# Altium PCB Serve.my-pi.PcbDoc
Units mm, origin at the board's own origin, x right, y up, seen from the top; angles counter-clockwise.
Board outline 50 x 50 mm, 2 copper layers (Top Layer, Bottom Layer), stack 1.671 mm thick; 89 components, 67 nets, 323 pads, 160 vias.
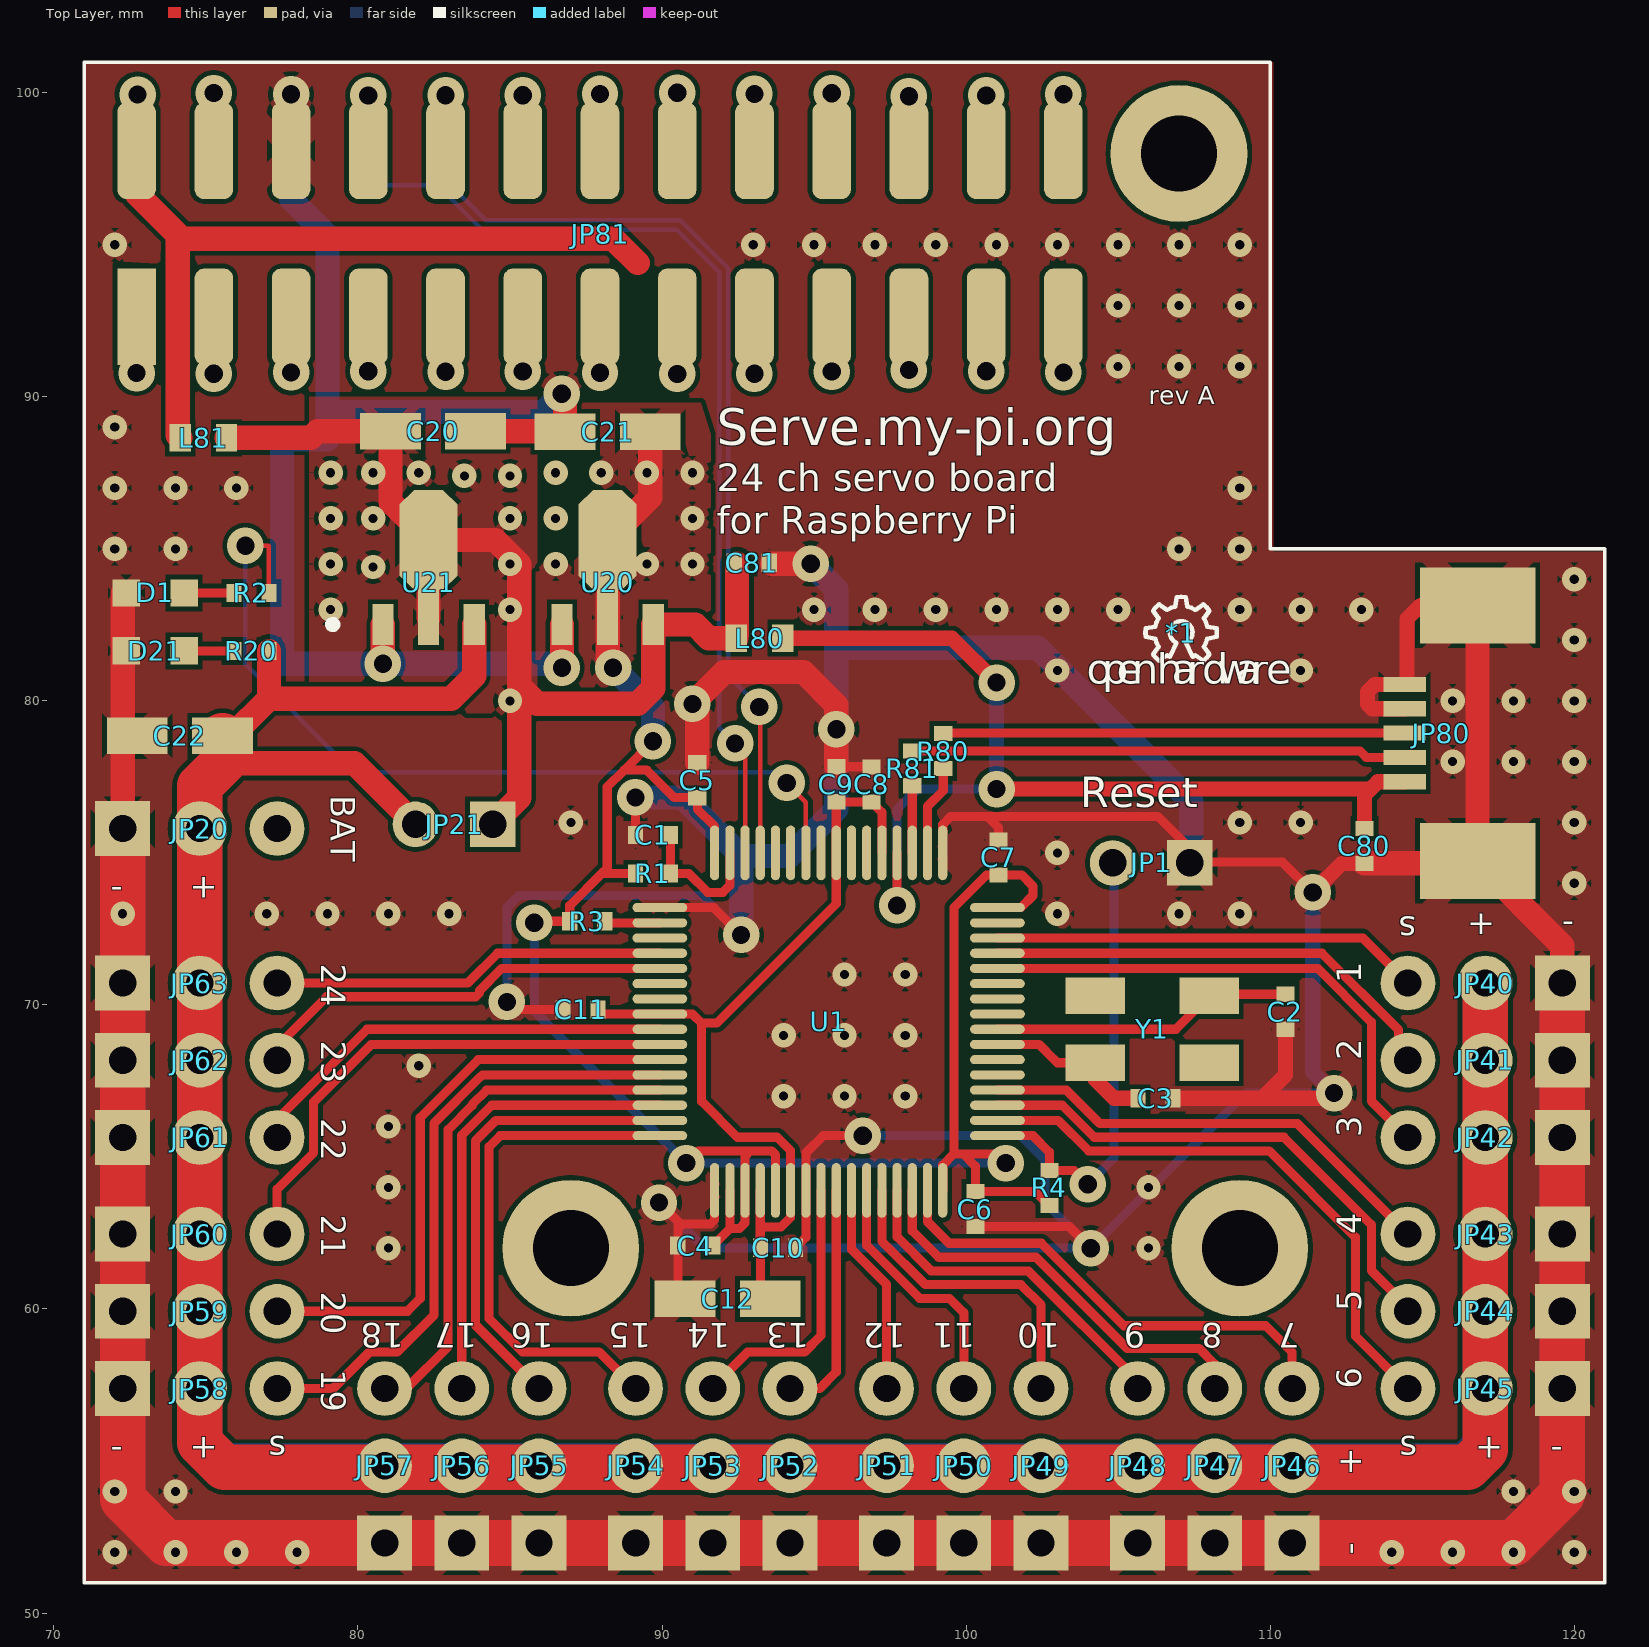
[diagram p0: Top Layer view]
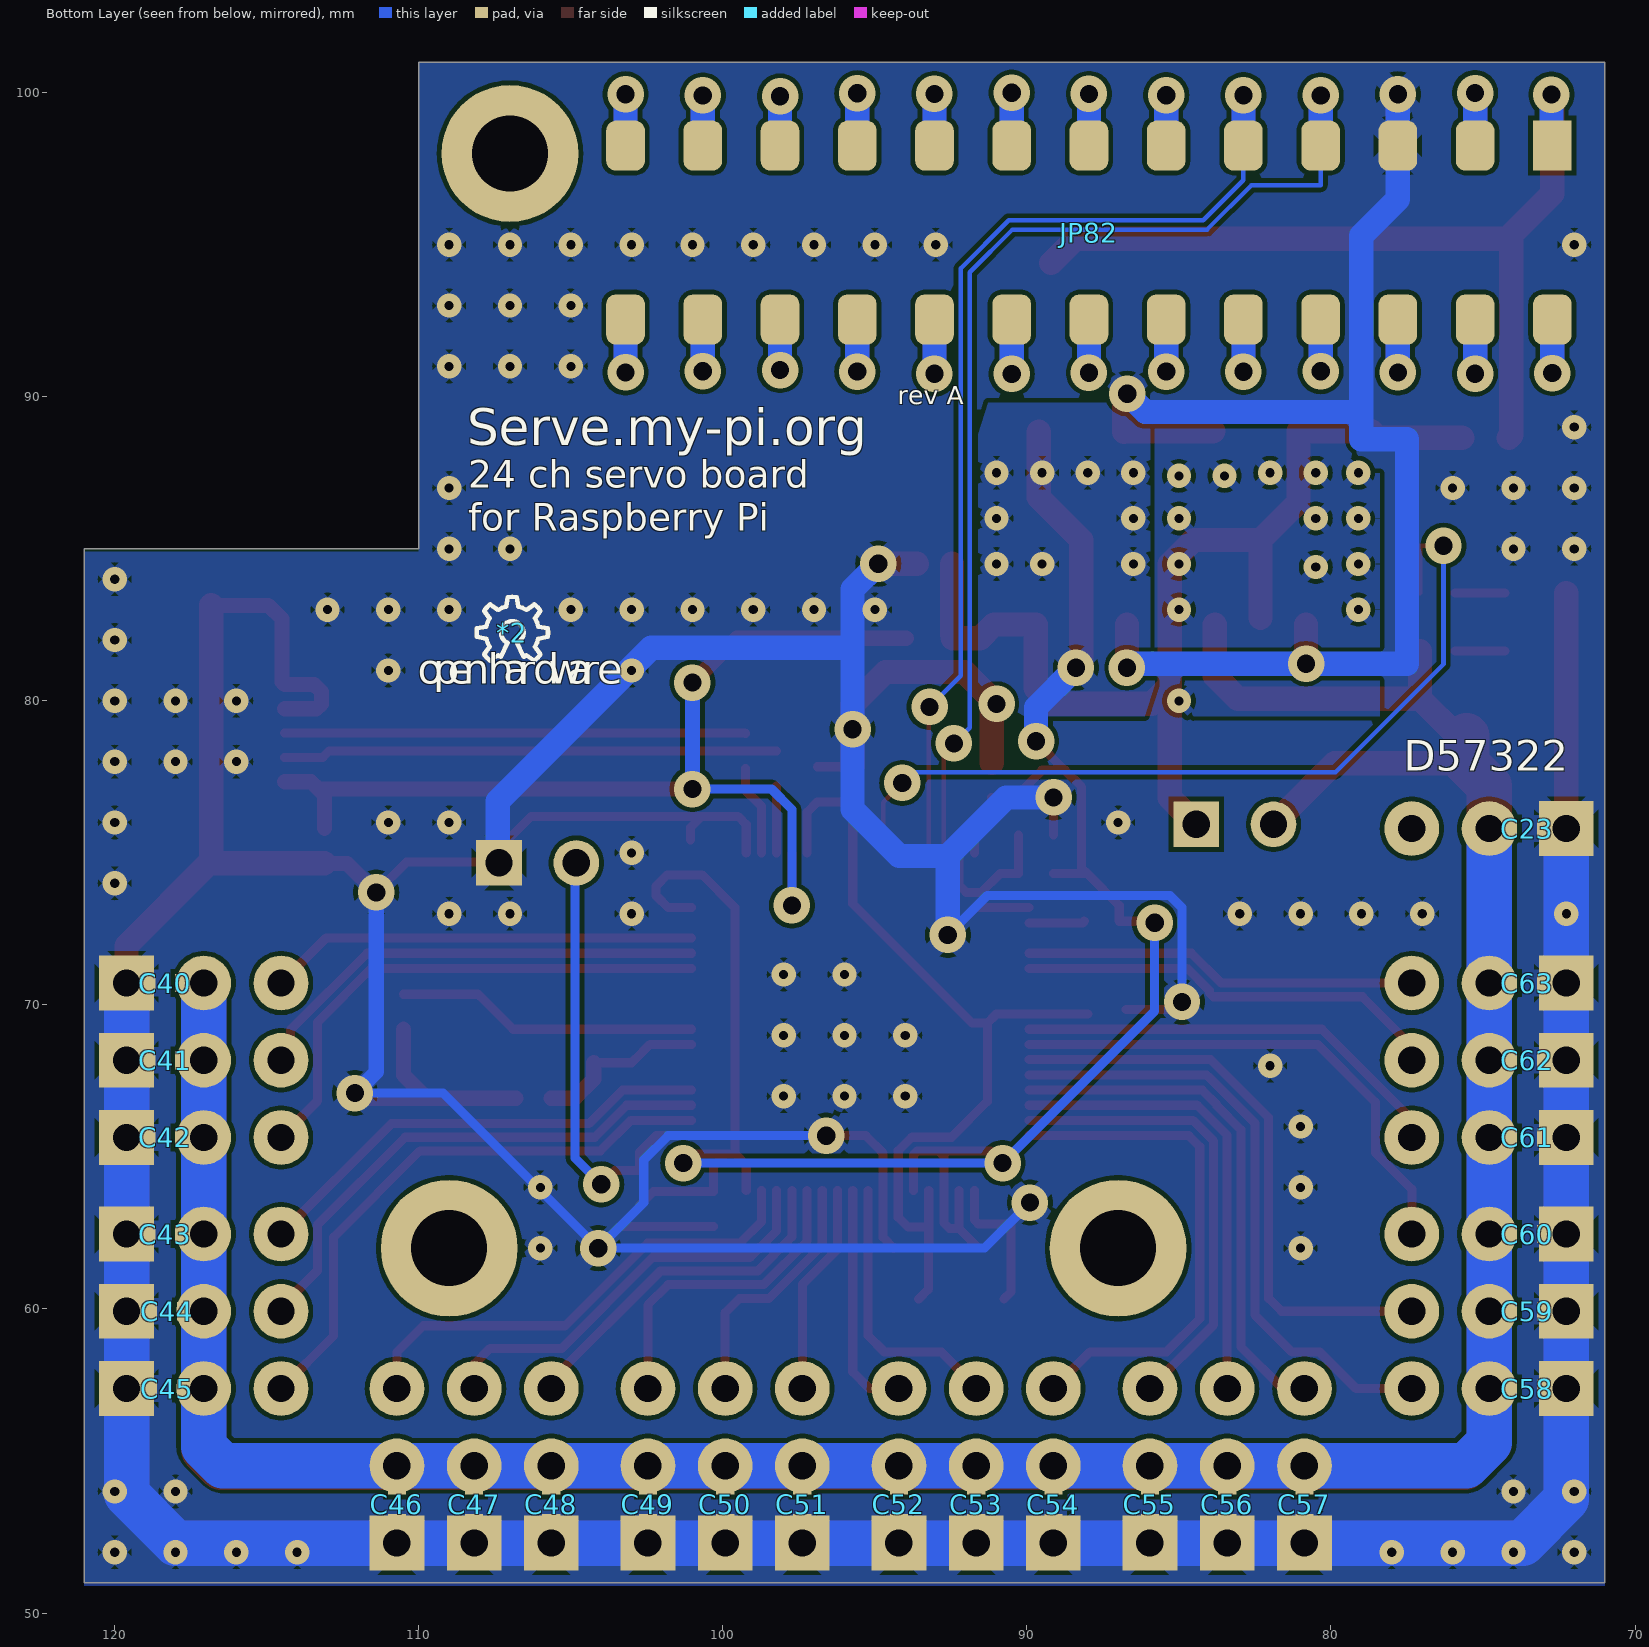
[diagram p1: Bottom Layer view, seen from below]

## Layer stack, top to bottom
Top Layer: signal copper 0.0356
Dielectric: core 1.6, FR-4, Dk 4.8
Bottom Layer: signal copper 0.0356

## Board outline
71,101 71,51 121,51 121,85 110,85 110,101

## Design rules (kind name [scope] priority, off if disabled: settings)
Clearance [All] p1: gap=0.15
ComponentClearance [All] p1: gap=0 collisioncheckmode=3 verticalgap=0 showdistances=FALSE
PolygonConnect PolygonConnect_1 [InNet('3V3') or InNet('GND') or InNet('NetC55_1') or InNet('SERVO-VDD')] p1: connectstyle=Relief reliefconductorwidth=0.6 reliefentries=4 polygonreliefangle="45 Angle"
PolygonConnect [All] p2: connectstyle=Relief reliefconductorwidth=0.3 reliefentries=4 polygonreliefangle="45 Angle"
RoutingVias RoutingVias_GND [InNet('GND')] p1: holewidth=0.9 width=1.5 viastyle="Through Hole" minholewidth=0.3 minwidth=0.7 maxholewidth=1.3 maxwidth=2
RoutingVias [All] p2: holewidth=0.4 width=0.7 viastyle="Through Hole" minholewidth=0.3 minwidth=0.7 maxholewidth=1.3 maxwidth=2
SilkToSilkClearance [All] p1: silktosilkclearance=0.05
SilkscreenOverComponentPads [All] p1: minsilkscreentomaskgap=0
SolderMaskExpansion [All] p1: expansion=0.102
Width Width_LOW_POWER [InNet('1V8')] p1: maxlimit=1 minlimit=0.3 preferedwidth=0.3
Width Width_GND [InNet('GND')] p2: maxlimit=2 minlimit=0.3 preferedwidth=0.3
Width [All] p3: maxlimit=2 minlimit=0.15 preferedwidth=0.15
25 further rules are at their usual default settings.

## Classes and differential pairs
component class Power: C16 C20 C21 C22 C23 D21 JP20 JP21 R20 U20 U21
component class Main: *1 C1 C2 C3 C4 C5 C6 C7 C8 C9 C10 C11 C12 C? D1 JP1 R1 R2 R3 R4 R? U1 U? Y1
component class SERVO-Outputs: C25 C26 C29 C30 C33 C34 C37 C39 C40 C41 C42 C43 C44 C45 C46 C47 C48 C49 C50 C51 C52 C53 C54 C55 C56 C57 C58 C59 C60 C61 C62 C63 JP6 JP12 JP13 JP16 JP19 JP24 JP40 JP41 JP42 JP43 JP44 JP45 JP46 JP47 JP48 JP49 JP50 JP51 JP52 JP53 JP54 JP55 JP56 JP57 JP58 JP59 JP60 JP61 JP62 JP63
net class SERVO-OUT[1..24]: SERVO-OUT1 SERVO-OUT2 SERVO-OUT3 SERVO-OUT4 SERVO-OUT5 SERVO-OUT6 SERVO-OUT7 SERVO-OUT8 SERVO-OUT9 SERVO-OUT10 SERVO-OUT11 SERVO-OUT12 SERVO-OUT13 SERVO-OUT14 SERVO-OUT15 SERVO-OUT16 SERVO-OUT17 SERVO-OUT18 SERVO-OUT19 SERVO-OUT20 SERVO-OUT21 SERVO-OUT22 SERVO-OUT23 SERVO-OUT24
component class Com: C80 C81 JP80 JP81 JP82 L80 L81 R80 R81

## Components (designator, comment, footprint, x,y, rotation, side; value= is the part's Value field where it differs from the comment)
*1 "OSHW" OSHW 107.07,82.24 r0 top
*2 "OSHW" OSHW 106.93,82.24 r180 bottom (schematic designator *1)
C1 "Condensateur" CC1005-0402 89.699,75.592 r0 top
C2 "Condensateur" CC1005-0402 110.5,69.775 r90 top
C3 "Condensateur" CC1005-0402 106.23,66.93 r0 top
C4 "Condensateur" CC1005-0402 91.095,62.084 r0 top
C5 "Condensateur" CC1005-0402 91.162,77.391 r270 top
C6 "Condensateur" CC1005-0402 100.306,63.287 r90 top
C7 "Condensateur" CC1005-0402 101.068,74.851 r270 top
C8 "Condensateur" CC1005-0402 96.89,77.25 r270 top
C9 "Condensateur" CC1005-0402 95.734,77.257 r270 top
C10 "Condensateur" CC1005-0402 93.815,62.015 r180 top
C11 "Condensateur" CC1005-0402 87.32,69.85 r0 top
C12 "Condensateur Polarise" TC3216-1206 92.16,60.33 r180 top
C20 "Condensateur Polarise" TC3216-1206 82.47,88.87 r0 top
C21 "Condensateur Polarise" TC3216-1206 88.21,88.85 r180 top
C22 "Condensateur Polarise" TC3216-1206 74.144,78.848 r180 top
C23 "Condensateur" CC1005-0402 73.55,75.8 r0 bottom
C40 "Condensateur" CC1005-0402 118.34,70.72 r180 bottom
C41 "Condensateur" CC1005-0402 118.34,68.18 r180 bottom
C42 "Condensateur" CC1005-0402 118.34,65.64 r180 bottom
C43 "Condensateur" CC1005-0402 118.34,62.465 r180 bottom
C44 "Condensateur" CC1005-0402 118.28,59.925 r180 bottom
C45 "Condensateur" CC1005-0402 118.28,57.385 r180 bottom
C46 "Condensateur" CC1005-0402 110.72,53.575 r90 bottom
C47 "Condensateur" CC1005-0402 108.18,53.575 r90 bottom
C48 "Condensateur" CC1005-0402 105.64,53.575 r90 bottom
C49 "Condensateur" CC1005-0402 102.465,53.575 r90 bottom
C50 "Condensateur" CC1005-0402 99.925,53.575 r90 bottom
C51 "Condensateur" CC1005-0402 97.385,53.575 r90 bottom
C52 "Condensateur" CC1005-0402 94.21,53.575 r90 bottom
C53 "Condensateur" CC1005-0402 91.67,53.575 r90 bottom
C54 "Condensateur" CC1005-0402 89.13,53.575 r90 bottom
C55 "Condensateur" CC1005-0402 85.955,53.575 r90 bottom
C56 "Condensateur" CC1005-0402 83.415,53.575 r90 bottom
C57 "Condensateur" CC1005-0402 80.875,53.575 r90 bottom
C58 "Condensateur" CC1005-0402 73.55,57.385 r0 bottom
C59 "Condensateur" CC1005-0402 73.55,59.925 r0 bottom
C60 "Condensateur" CC1005-0402 73.55,62.465 r0 bottom
C61 "Condensateur" CC1005-0402 73.55,65.64 r0 bottom
C62 "Condensateur" CC1005-0402 73.55,68.18 r0 bottom
C63 "Condensateur" CC1005-0402 73.55,70.72 r0 bottom
C80 "Condensateur" CC1005-0402 113.1,75.23 r90 top
C81 "Condensateur" CC1005-0402 92.95,84.54 r180 top
D1 "Led" DIODE-0603 73.382,83.547 r180 top
D21 "Led" DIODE-0603 73.382,81.642 r180 top
JP1 "Jumper" HDR1X2 107.36,74.67 r180 top
JP20 "SERVO Connector" PinHead-3pts 74.8,75.8 r90 top
JP21 "Jumper" HDR1X2 84.43,75.94 r180 top
JP40 "SERVO Connector" PinHead-3pts 117.07,70.72 r270 top
JP41 "SERVO Connector" PinHead-3pts 117.07,68.18 r270 top
JP42 "SERVO Connector" PinHead-3pts 117.07,65.64 r270 top
JP43 "SERVO Connector" PinHead-3pts 117.07,62.465 r270 top
JP44 "SERVO Connector" PinHead-3pts 117.07,59.925 r270 top
JP45 "SERVO Connector" PinHead-3pts 117.07,57.385 r270 top
JP46 "SERVO Connector" PinHead-3pts 110.72,54.845 r180 top
JP47 "SERVO Connector" PinHead-3pts 108.18,54.845 r180 top
JP48 "SERVO Connector" PinHead-3pts 105.64,54.845 r180 top
JP49 "SERVO Connector" PinHead-3pts 102.465,54.845 r180 top
JP50 "SERVO Connector" PinHead-3pts 99.925,54.845 r180 top
JP51 "SERVO Connector" PinHead-3pts 97.385,54.845 r180 top
JP52 "SERVO Connector" PinHead-3pts 94.21,54.845 r180 top
JP53 "SERVO Connector" PinHead-3pts 91.67,54.845 r180 top
JP54 "SERVO Connector" PinHead-3pts 89.13,54.845 r180 top
JP55 "SERVO Connector" PinHead-3pts 85.955,54.845 r180 top
JP56 "SERVO Connector" PinHead-3pts 83.415,54.845 r180 top
JP57 "SERVO Connector" PinHead-3pts 80.875,54.845 r180 top
JP58 "SERVO Connector" PinHead-3pts 74.8,57.385 r90 top
JP59 "SERVO Connector" PinHead-3pts 74.8,59.925 r90 top
JP60 "SERVO Connector" PinHead-3pts 74.8,62.465 r90 top
JP61 "SERVO Connector" PinHead-3pts 74.8,65.64 r90 top
JP62 "SERVO Connector" PinHead-3pts 74.8,68.18 r90 top
JP63 "SERVO Connector" PinHead-3pts 74.8,70.72 r90 top
JP80 "USB Mini-B SMD" UX60SC-MB-5ST 120.57,78.94 r0 top
JP81 "Top male part of Raspberry Pi expand port" "2x13 pins SMT male header" 72.72,92.82 r0 top
JP82 "Bottom female part of Raspberry Pi expand port" "2x13 pins SMT female header" 72.72,97.94 r0 bottom
L80 "Ferrite" CR1608-0603 93.22,82.06 r0 top
L81 "Ferrite" CR1608-0603 74.93,88.65 r0 top
R1 "Resistance" CR1005-0402 89.699,74.322 r180 top
R2 "Resistance" CR1005-0402 76.497,83.547 r180 top
R3 "Resistance" CR1005-0402 87.539,72.752 r180 top
R4 "Resistance" CR1005-0402 102.74,63.98 r270 top
R20 "Resistance" CR1005-0402 76.497,81.642 r0 top
R80 "Resistance" CR1005-0402 99.25,78.35 r270 top
R81 "Resistance" CR1005-0402 98.23,77.78 r270 top
U1 "AT32UC3B0xxx" TSQFP50P1200X1200-64N 95.48,69.45 r0 top
U20 "AP1117" SOT-89 88.21,83.9 r0 top
U21 "AP1117" SOT-89 82.32,83.9 r0 top
Y1 "Quartz" 7B 104.248,68.1 r0 top

## Footprints (in the part's own frame and the unit in brackets; to place one, negate y for a bottom-side part, rotate by r counter-clockwise, add the part's x,y. Pads: shape width x height; smd on the part's side, far side on the other; paste and mask are expansions set on the pad)
"2x13 pins SMT female header" [mm] "Dual row, SMT, female header (2x13 pins)"
  rect 1.27x1.65 smd: 1(0,-0.32)
  rrect50% 1.27x1.65 smd: 2(0,5.4) 3(2.54,-0.32) 4(2.54,5.4) 5(5.08,-0.32) 6(5.08,5.4) 7(7.62,-0.32) 8(7.62,5.4) 9(10.16,-0.32) 10(10.16,5.4) 11(12.7,-0.32) 12(12.7,5.4) 13(15.24,-0.32) 14(15.24,5.4) 15(17.78,-0.32) 16(17.78,5.4) 17(20.32,-0.32) 18(20.32,5.4) 19(22.86,-0.32) 20(22.86,5.4) 21(25.4,-0.32) 22(25.4,5.4) 23(27.94,-0.32) 24(27.94,5.4) 25(30.48,-0.32) 26(30.48,5.4)
"2x13 pins SMT male header" [mm] "Dual row, SMT, male header (2x13 pins)"
  rect 1.27x3.18 smd: 1(0,-0.19)
  rrect50% 1.27x3.18 smd: 2(0,5.27) 3(2.54,-0.19) 4(2.54,5.27) 5(5.08,-0.19) 6(5.08,5.27) 7(7.62,-0.19) 8(7.62,5.27) 9(10.16,-0.19) 10(10.16,5.27) 11(12.7,-0.19) 12(12.7,5.27) 13(15.24,-0.19) 14(15.24,5.27) 15(17.78,-0.19) 16(17.78,5.27) 17(20.32,-0.19) 18(20.32,5.27) 19(22.86,-0.19) 20(22.86,5.27) 21(25.4,-0.19) 22(25.4,5.27) 23(27.94,-0.19) 24(27.94,5.27) 25(30.48,-0.19) 26(30.48,5.27)
7B [mm] "SMD Quartz, 5x3.2 mm"
  rect 1.95x1.2 smd: 0(0,2.2) 0(3.75,0) 1(0,0) 2(3.75,2.2)
CC1005-0402 [mm]
  rect 0.5x0.6 smd: 1(-0.575,0) 2(0.575,0)
CR1005-0402 [mm]
  rect 0.5x0.6 smd: 1(-0.575,0) 2(0.575,0)
CR1608-0603 [mm]
  rect 0.7x0.9 smd: 1(-0.775,0) 2(0.75,0)
DIODE-0603 [mm]
  rect 0.9x0.9 smd: 1(-0.9,0) 2(1,0)
HDR1X2 [mm] "Connector; Header; 2 Position"
  rect 1.5x1.5 hole 0.9: 1(0,0)
  round 1.5 hole 0.9: 2(2.54,0)
OSHW [mm] "Open Hardware logo"
  silkscreen extent -1.17,-0.92 1.18,1.18
PinHead-3pts [mm]
  rect 1.8x1.8 hole 0.9: 1(0,2.54)
  round 1.8 hole 0.9: 2(0,0) 3(0,-2.54)
SOT-89 [mm] "SOT-89; Body 4.6 x 4.25 mm, inc. leads (LxW max)"
  oct 1.9x3.3 smd: 0(0,1.388)
  rect 0.7x1.35 smd: 1(-1.5,-1.388) 3(1.5,-1.388)
  rect 0.7x1.8 smd: 2(0,-1.163)
TC3216-1206 [mm] "Capacitor, SM Tantalum; Body 3.2 x 1.6 mm (LxW typ)"
  rect 2x1.2 smd: 1(-1.4,0) 2(1.4,0)
TSQFP50P1200X1200-64N [mm] "Thin QFP, 64-Leads, Body 10x10mm, Pitch 0.5mm, IPC Medium Density"
  oval 1.8x0.3 smd: 1(-5.55,3.75) 2(-5.55,3.25) 3(-5.55,2.75) 4(-5.55,2.25) 5(-5.55,1.75) 6(-5.55,1.25) 7(-5.55,0.75) 8(-5.55,0.25) 9(-5.55,-0.25) 10(-5.55,-0.75) 11(-5.55,-1.25) 12(-5.55,-1.75) 13(-5.55,-2.25) 14(-5.55,-2.75) 15(-5.55,-3.25) 16(-5.55,-3.75) 33(5.55,-3.75) 34(5.55,-3.25) 35(5.55,-2.75) 36(5.55,-2.25) 37(5.55,-1.75) 38(5.55,-1.25) 39(5.55,-0.75) 40(5.55,-0.25) 41(5.55,0.25) 42(5.55,0.75) 43(5.55,1.25) 44(5.55,1.75) 45(5.55,2.25) 46(5.55,2.75) 47(5.55,3.25) 48(5.55,3.75)
  oval 0.3x1.8 smd: 17(-3.75,-5.55) 18(-3.25,-5.55) 19(-2.75,-5.55) 20(-2.25,-5.55) 21(-1.75,-5.55) 22(-1.25,-5.55) 23(-0.75,-5.55) 24(-0.25,-5.55) 25(0.25,-5.55) 26(0.75,-5.55) 27(1.25,-5.55) 28(1.75,-5.55) 29(2.25,-5.55) 30(2.75,-5.55) 31(3.25,-5.55) 32(3.75,-5.55) 49(3.75,5.55) 50(3.25,5.55) 51(2.75,5.55) 52(2.25,5.55) 53(1.75,5.55) 54(1.25,5.55) 55(0.75,5.55) 56(0.25,5.55) 57(-0.25,5.55) 58(-0.75,5.55) 59(-1.25,5.55) 60(-1.75,5.55) 61(-2.25,5.55) 62(-2.75,5.55) 63(-3.25,5.55) 64(-3.75,5.55)
UX60SC-MB-5ST [mm] "Connector; USB2.0, Type B, SM; 5 Position; Right Angle"
  rect 1.4x0.5 smd: 1(-6.15,-1.6) 2(-6.15,-0.8) 3(-6.15,0) 4(-6.15,0.8) 5(-6.15,1.6)
  rect 3.8x2.5 smd: 6(-3.75,4.2) 7(-3.75,-4.2)

## Part data
*1 *2: "Open Hardware logo"
JP1 JP21: "Header 2 pts"
JP20 JP40 JP41 JP42 JP43 JP44 JP45 JP46 JP47 JP48 JP49 JP50 JP51 JP52 JP53 JP54 JP55 JP56 JP57 JP58 JP59 JP60 JP61 JP62 JP63: library part SERVO-Connector
JP80: "USB Mini, Type B, SMD"
JP81: library part RPi-ExtPort-Top
JP82: library part RPi-ExtPort-Bottom
L80 L81: "Ferrite CMS"
U1: "AVR32 32-Bit Microcontroller"
U20 U21: "AP1117 - 3V3 Voltage Regulator"
Y1: "SMD Crystal oscillator"

## Free pads (board coordinates)
  round 4.5 hole 2.5: 0(87,62) 0(107,98) 0(109,62)

## Via types
v1: diameter 0.8, hole 0.3, Top Layer to Bottom Layer, 107 vias
v2: diameter 1.2, hole 0.6, Top Layer to Bottom Layer, 53 vias

## Nets (pads, with @x,y where several pads share a name; then routed paths per layer and width w, separated by ;. In a path a pad name is that pad's centre, name@x,y a point inside that pad or via, vN(x,y) a via of type N, cw(c..) or ccw(c..) an arc to the next point about the centre after c; other vN are vias at no path point)
1V8: C8.2 C9.2 C10.2 C11.2 C12.1 U1.8 U1.20 U1.22 U1.53 U1.56 | length 28.8
  Top Layer w0.3: C11.2@87.994,69.704 87.998,69.7 U1.8 91,69.7 91.3,69.4 ; C10.2@93.23,62.175 U1.20 ; C10.2 93.24,60.65 C12.1 ; 93.33,62.7 93.916,62.7 94.23,63.014 U1.22 94.23,65.206 93.786,65.65 92.48,65.65 91.3,66.83 91.3,69.4 ; U1.53 97.23,76.335 C8.2 95.733,76.675 95.73,76.678 U1.56 95.73,73.33 91.8,69.4 91.3,69.4
3V3: C4.2 C5.2 C6.2 C7.2 C21.1 R1.2 R3.2 R4.2 U1.18 U1.19 U1.21 U1.32 U1.48 U1.64 U20.0 U20.2 | length 75.7
  Top Layer w0.3: v2(85.8,72.7) 85.852,72.752 R3.2 86.964,73.264 88.022,74.322 ; R1.2 88.022,74.322 ; v2(89.7,78.673) 88.751,77.724 ; v2(90.8,64.8) 91.2,65.2 92.9,65.2 ; C4.2 92.23,62.644 ; U1.64 91.73,75.87 91.162,76.438 C5.2 90.405,76.816 89.497,77.724 88.751,77.724 ; U1.18 92.23,62.644 ; U1.21 93.73,65.07 93.6,65.2 92.9,65.2 ; U1.32 99.23,64.73 99.6,65.1 ; U1.48 101.8,73.2 102.2,73.6 102.2,73.9 101.824,74.276 C7.2 100.676,74.276 99.6,73.2 99.6,65.1 ; v2(101.3,64.8) 101,65.1 99.9,65.1 ; R4.2 102.283,63.862 C6.2 100.306,64.694 99.9,65.1 ; 88.022,74.322 88.2,74.5 88.2,77.173 88.751,77.724 ; 92.23,62.644 92.544,62.644 92.73,62.83 U1.19 92.73,65.03 92.9,65.2 ; 99.6,65.1 99.9,65.1
  Top Layer w0.8: v2(88.39,81.09) 88.21,81.09 U20.2 U20.0 89.61,86.687 C21.1
  Bottom Layer w0.3: v2(85.8,72.7) 85.8,69.8 v2(90.8,64.8) v2(101.3,64.8)
  Bottom Layer w0.8: v2(88.39,81.09) 89.7,79.78 v2(89.7,78.673)
  other v1: 86.5,84.5 89.5,84.5 91,84.5 86.5,86 91,86 86.5,87.5 88,87.5 89.5,87.5 91,87.5
3V3-RPI: JP81.1 JP82.2 | length 3.7
  Top Layer w0.8: v2@72.69,90.75 v2(72.72,90.78) JP81.1
  Bottom Layer w0.8: v2(72.72,90.78) JP82.2
5V: C20.1 C81.2 JP21.1 L80.1 L81.2 U20.3 U21.0 U21.2 | length 36.7
  Top Layer w0.8: L81.2 78.45,88.65 78.67,88.87 C20.1 81.07,86.538 U21.0 ; U21.2 U21.0 ; JP21.1 85.3,76.81 85.3,80.5 ; L80.1@92.405,82.1 92.465,82.16 C81.2@92.465,84.51 ; L80.1 91.54,82.06 91.088,82.512 U20.3 89.71,80.41 89.2,79.9 85.9,79.9 85.3,80.5 ; U21.0 84.513,85.288 85.3,84.5 85.3,80.5
  other v1: 85,80 79.1,83 85,83 80.5,84.4 79.1,84.5 85,84.5 79.1,86 80.5,86 85,86 83.5,87.4 85,87.4 79.1,87.5 80.5,87.5 82,87.5
5V-RPI: JP81.2 JP82.1 L81.1 | length 29.1
  Top Layer w0.8: v2(72.75,99.94) 72.72,99.97 JP81.2 72.72,96.68 74.2,95.2 ; L81.1 74.075,88.73 74.075,95.075 74.2,95.2 ; 89.2,94.4 88.4,95.2 74.2,95.2
  Bottom Layer w0.8: JP82.1 72.75,98.29 v2(72.75,99.94)
GND: C1.1 C2.1 C3.2 C4.1 C5.1 C6.1 C7.1 C8.1 C9.1 C10.1 C11.1 C12.2 C20.2 C21.2 C22.2 C23.1 C40.1 C41.1 C42.1 C43.1 C44.1 C45.1 C46.1 C47.1 C48.1 C49.1 C50.1 C51.1 C52.1 C53.1 C54.1 C55.1 C56.1 C57.1 C58.1 C59.1 C60.1 C61.1 C62.1 C63.1 C80.1 C81.1 D1.2 D21.2 JP1.1 JP20.1 JP40.1 JP41.1 JP42.1 JP43.1 JP44.1 JP45.1 JP46.1 JP47.1 JP48.1 JP49.1 JP50.1 JP51.1 JP52.1 JP53.1 JP54.1 JP55.1 JP56.1 JP57.1 JP58.1 JP59.1 JP60.1 JP61.1 JP62.1 JP63.1 JP80.4 JP80.5 JP80.6 JP80.7 JP81.6 JP82.5 U1.1 U1.17 U1.23 U1.49 U20.1 U21.1 | length 401.3
  Top Layer w0.3: v2(84.9,70.1) 85.15,69.85 C11.1 ; C1.1 v2(89.124,76.824) ; v2(89.9,63.5) 90.52,62.88 90.52,62.62 ; U1.1 91,73.2 91.7,73.2 v2(92.6,72.3) ; C12.2 90.52,60.57 C4.1 90.52,62.62 ; U1.17 91.73,62.93 91.6,62.8 90.7,62.8 90.52,62.62 ; C10.1 94.73,62.355 U1.23 94.73,65.13 95.3,65.7 v2(96.6,65.7) ; C9.1 C8.1@96.883,77.832 ; U1.49 99.23,75.93 99.5,76.2 100.7,76.2 ; C6.1 103.388,62.712 v2(104.1,62) ; C7.1 101.068,75.832 100.7,76.2 ; v2(111.4,73.7) 110.4,74.7 107.4,74.7 107.4,75.1 106.3,76.2 100.7,76.2
  Top Layer w0.5: C3.2 109.73,66.93 ; C2.1 110.5,67.7 109.73,66.93 ; v2(111.4,73.7) 112.355,74.655 C80.1 ; v2(112.1,67.1) 111.93,66.93 109.73,66.93 ; JP80.4 113.36,79.74 113.2,79.9 113.2,80.3 113.44,80.54 JP80.5 114.5,80.62 114.5,82.7 114.94,83.14 JP80.6
  Top Layer w0.8: JP20.1 D1.2@72.26,83.547 ; JP81.6 v2(77.8,99.95) ; v2(80.82,81.22) U21.1 ; C20.2 86.79,88.87 C21.2 86.81,89.99 v2(86.7,90.1) ; v2(86.71,81.09) U20.1 ; C5.1 91.162,79.738 v2(91,79.9) 92.05,80.95 94.65,80.95 95.734,79.866 v2(95.734,79.066) C9.1 ; C81.1@93.615,84.51 v2(94.89,84.51) ; C80.1 116.735,74.655 JP80.7 ; JP80.6 JP80.7 ; JP40.1 119.61,71.95 JP80.7
  Top Layer w1.5: JP20.1 JP63.1 JP62.1 JP61.1 JP60.1 JP59.1 JP58.1 72.26,53.74 73.695,52.305 JP57.1 JP56.1 JP55.1 JP54.1 JP53.1 JP52.1 JP51.1 JP50.1 JP49.1 JP48.1 JP47.1 JP46.1 118.005,52.305 119.61,53.91 JP45.1 JP44.1 JP43.1 JP42.1 JP41.1 JP40.1
  Bottom Layer w0.3: v2(84.9,70.1) 84.9,73.2 85.3,73.6 91.3,73.6 v2(92.6,72.3) ; v2(89.9,63.5) 91.4,62 v2(104.1,62) ; v2(96.6,65.7) 101.8,65.7 102.6,64.9 102.6,63.5 v2(104.1,62) ; v2(112.1,67.1) 109.2,67.1 v2(104.1,62)
  Bottom Layer w0.5: v2(111.4,73.7) 111.4,67.8 v2(112.1,67.1)
  Bottom Layer w0.8: v2(77.8,99.95) JP82.5 77.8,96.5 79,95.3 79,89.5 ; v2@86.58,81.22 v2(80.82,81.22) 77.5,81.22 77.5,88.6 79,88.6 79,89.5 ; v2(86.7,90.1) 86.1,89.5 79,89.5 ; v2(89.124,76.824) 90.676,76.824 92.6,74.9 ; v2(92.6,72.3) 92.6,74.9 ; v2(94.89,84.51) 95.734,83.666 v2(95.734,79.066) 95.734,76.434 94.2,74.9 92.6,74.9 ; 95.784,81.75 102.35,81.75 107.4,76.7 JP1.1@107.4,74.7
  Bottom Layer w1.5: JP20.1 JP63.1 JP62.1 JP61.1 JP60.1 JP59.1 JP58.1 72.26,53.74 73.7,52.3 85.955,52.3 94.21,52.3 102.465,52.3 110.72,52.3 118,52.3 119.61,53.91 JP45.1 JP44.1 JP43.1 JP42.1 JP41.1 JP40.1
  other v1: 72,52 74,52 76,52 78,52 114,52 116,52 118,52 120,52 72,54 74,54 118,54 120,54 81,62 106,62 81,64 106,64 81,66 94,67 96,67 98,67 82,68 94,69 96,69 98,69 96,71 98,71 72.26,73 77,73 79,73 81,73 83,73 103,73 107,73 109,73 120,74 103,75 87,76 109,76 111,76 120,76 116,78 118,78 120,78 116,80 118,80 120,80 103,81 111,81 120,82 95,83 97,83 99,83 101,83 103,83 105,83 109,83 111,83 113,83 120,84 72,85 74,85 107,85 109,85 72,87 74,87 76,87 109,87 72,89 105,91 107,91 109,91 105,93 107,93 109,93 72,95 93,95 95,95 97,95 99,95 101,95 103,95 105,95 107,95 109,95
NC-4: JP81.4 JP82.3 | length 3.6
  Top Layer w0.8: JP81.4 v2(75.26,99.99)
  Bottom Layer w0.8: JP82.3 v2(75.26,99.99)
NC-9: JP81.9 JP82.10 | length 3.5
  Top Layer w0.8: v2(82.88,90.82) JP81.9
  Bottom Layer w0.8: v2(82.88,90.82) JP82.10
NC-14: JP81.14 JP82.13 | length 3.6
  Top Layer w0.8: JP81.14 v2(87.96,99.96)
  Bottom Layer w0.8: JP82.13 v2(87.96,99.96)
NC-17: JP81.17 JP82.18 | length 3.7
  Top Layer w0.8: v2(93.04,90.76) JP81.17
  Bottom Layer w0.8: v2(93.04,90.76) JP82.18
NC-20: JP81.20 JP82.19 | length 3.6
  Top Layer w0.8: JP81.20 v2(95.58,99.98)
  Bottom Layer w0.8: JP82.19 v2(95.58,99.98)
NC-25: JP81.25 JP82.26 | length 3.6
  Top Layer w0.8: v2(103.2,90.8) JP81.25
  Bottom Layer w0.8: v2(103.2,90.8) JP82.26
NetC1_2: C1.2 R1.1 U1.63 | length 4.6
  Top Layer w0.3: C1.2 R1.1 90.878,74.322 91.5,73.7 92,73.7 92.23,73.93 U1.63
NetC2_2: C2.2 U1.40 Y1.2 | length 9.9
  Top Layer w0.3: U1.40 102.5,69.2 106.898,69.2 Y1.2 108.048,70.35 C2.2
NetC3_1: C3.1 U1.39 Y1.1 | length 5.7
  Top Layer w0.3: U1.39 102.4,68.7 102.901,68.2 103.001,68.1 Y1.1
  Top Layer w0.5: Y1.1 104.248,67.552 104.87,66.93 C3.1
NetD1_1: D1.1 R2.2 | length 1.6
  Top Layer w0.3: D1.1 R2.2
NetD21_1: D21.1 R20.1 | length 1.6
  Top Layer w0.3: D21.1 R20.1
NetJP1_2: JP1.2 R4.1 U1.33 | length 14.9
  Top Layer w0.3: U1.33 102.2,65.7 102.74,65.16 R4.1 103.545,64.555 v2(104,64.1)
  Bottom Layer w0.3: v2(104,64.1) 104.86,64.96 JP1.2@104.86,74.7
NetJP80_2: JP80.2 R81.1 | length 16.3
  Top Layer w0.3: R81.1 112.945,78.355 113.16,78.14 JP80.2
NetJP80_3: JP80.3 R80.1 | length 15.2
  Top Layer w0.3: R80.1 99.265,78.94 JP80.3
NetR2_1: R2.1 U1.58 | length 28.2
  Top Layer w0.15: v2(76.3,85.1) 77.072,85.1 R2.1 ; v2(94.1,77.3) 94.73,76.67 U1.58
  Bottom Layer w0.15: v2(76.3,85.1) 76.3,81.2 79.851,77.649 93.751,77.649 v2(94.1,77.3)
NetR3_1: R3.1 U1.2 | length 1.8
  Top Layer w0.3: R3.1 88.166,72.7 U1.2
P0: JP81.3 JP82.4 | length 3.7
  Top Layer w0.8: v2(75.26,90.76) JP81.3
  Bottom Layer w0.8: v2(75.26,90.76) JP82.4
P1: JP81.5 JP82.6 | length 3.6
  Top Layer w0.8: v2(77.8,90.8) JP81.5
  Bottom Layer w0.8: v2(77.8,90.8) JP82.6
P4: JP81.7 JP82.8 | length 3.5
  Top Layer w0.8: v2(80.34,90.84) JP81.7
  Bottom Layer w0.8: v2(80.34,90.84) JP82.8
P7: JP81.26 JP82.25 | length 3.6
  Top Layer w0.8: JP81.26 v2(103.2,99.95)
  Bottom Layer w0.8: JP82.25 v2(103.2,99.95)
P8: JP81.24 JP82.23 | length 3.5
  Top Layer w0.8: JP81.24 v2(100.66,99.91)
  Bottom Layer w0.8: JP82.23 v2(100.66,99.91)
P9: JP81.21 JP82.22 | length 3.4
  Top Layer w0.8: v2(98.12,90.88) JP81.21
  Bottom Layer w0.8: v2(98.12,90.88) JP82.22
P10: JP81.19 JP82.20 | length 3.5
  Top Layer w0.8: v2(95.58,90.83) JP81.19
  Bottom Layer w0.8: v2(95.58,90.83) JP82.20
P11: JP81.23 JP82.24 | length 3.5
  Top Layer w0.8: v2(100.66,90.84) JP81.23
  Bottom Layer w0.8: v2(100.66,90.84) JP82.24
P17: JP81.11 JP82.12 | length 3.5
  Top Layer w0.8: v2(85.42,90.83) JP81.11
  Bottom Layer w0.8: v2(85.42,90.83) JP82.12
P18: JP81.12 JP82.11 | length 3.5
  Top Layer w0.8: JP81.12 v2(85.42,99.92)
  Bottom Layer w0.8: JP82.11 v2(85.42,99.92)
P21: JP81.13 JP82.14 | length 3.6
  Top Layer w0.8: v2(87.96,90.79) JP81.13
  Bottom Layer w0.8: v2(87.96,90.79) JP82.14
P22: JP81.15 JP82.16 | length 3.7
  Top Layer w0.8: v2(90.5,90.75) JP81.15
  Bottom Layer w0.8: v2(90.5,90.75) JP82.16
P23: JP81.16 JP82.15 | length 3.7
  Top Layer w0.8: JP81.16 v2(90.5,100)
  Bottom Layer w0.8: JP82.15 v2(90.5,100)
P24: JP81.18 JP82.17 | length 3.6
  Top Layer w0.8: JP81.18 v2(93.04,99.96)
  Bottom Layer w0.8: JP82.17 v2(93.04,99.96)
P25: JP81.22 JP82.21 | length 3.4
  Top Layer w0.8: JP81.22 v2(98.12,99.88)
  Bottom Layer w0.8: JP82.21 v2(98.12,99.88)
RPI-RX: JP81.10 JP82.9 U1.61 | length 34.7
  Top Layer w0.15: v2(93.2,79.8) 93.23,79.77 U1.61
  Top Layer w0.8: JP81.10 v2@82.88,99.87
  Bottom Layer w0.15: JP82.9 82.88,97.12 84.2,95.8 90.6,95.8 92.18,94.22 92.18,91.788 92.18,80.82 v2(93.2,79.8)
  Bottom Layer w0.8: JP82.9 v2@82.88,99.87
  other v2: 82.88,99.92
RPI-TX: JP81.8 JP82.7 U1.62 | length 36.9
  Top Layer w0.15: v2(92.4,78.6) 92.73,78.27 U1.62
  Top Layer w0.8: JP81.8 v2(80.34,99.91)
  Bottom Layer w0.15: JP82.7 80.34,96.96 82.616,96.96 84.076,95.5 90.476,95.5 91.88,94.096 91.88,79.12 v2(92.4,78.6)
  Bottom Layer w0.8: JP82.7 v2(80.34,99.91)
SERVO-OUT1: JP40.3 U1.46 | length 14.1
  Top Layer w0.3: U1.46 113.05,72.2 JP40.3
SERVO-OUT2: JP41.3 U1.45 | length 15.5
  Top Layer w0.3: U1.45 111.7,71.7 114.22,69.18 114.22,68.18 JP41.3
SERVO-OUT3: JP42.3 U1.44 | length 17.3
  Top Layer w0.3: U1.44@101.03,71.2 111.564,71.2 113.33,69.434 113.33,66.84 JP42.3
SERVO-OUT4: JP43.3 U1.36 | length 15.5
  Top Layer w0.3: U1.36@101.031,67.199 103.301,67.199 104.4,66.1 110.895,66.1 JP43.3
SERVO-OUT5: JP44.3 U1.35 | length 17.3
  Top Layer w0.3: U1.35 103.164,66.7 104.214,65.65 110.45,65.65 113.33,62.77 113.33,61.265 114.53,60.065 JP44.3
SERVO-OUT6: JP45.3 U1.34 | length 19.1
  Top Layer w0.3: U1.34 103.027,66.2 104.027,65.2 109.964,65.2 112.8,62.364 112.8,59.115 JP45.3
SERVO-OUT7: JP46.3 U1.31 | length 16
  Top Layer w0.3: U1.31 98.73,62.87 99.438,62.162 102.474,62.162 105.186,59.45 109.85,59.45 110.72,58.58 JP46.3
SERVO-OUT8: JP47.3 U1.30 | length 13.9
  Top Layer w0.3: U1.30 98.23,62.57 99.1,61.7 102.3,61.7 105.3,58.7 107.664,58.7 108.18,58.184 JP47.3
SERVO-OUT9: JP48.3 U1.29 | length 11.7
  Top Layer w0.3: U1.29 97.73,62.37 98.85,61.25 102.05,61.25 105.64,57.66 JP48.3
SERVO-OUT10: JP49.3 U1.28 | length 10.5
  Top Layer w0.3: U1.28 97.23,62.234 98.664,60.8 101.8,60.8 102.465,60.135 JP49.3
SERVO-OUT11: JP50.3 U1.27 | length 8.4
  Top Layer w0.3: U1.27 96.73,62.097 98.477,60.35 99.45,60.35 99.925,59.875 JP50.3
SERVO-OUT12: JP51.3 U1.26 | length 7
  Top Layer w0.3: U1.26 96.23,61.961 97.385,60.806 JP51.3
SERVO-OUT13: JP52.3 U1.25 | length 7.7
  Top Layer w0.3: JP52.3 95.185,57.385 95.73,57.93 U1.25
SERVO-OUT14: JP53.3 U1.24 | length 9.1
  Top Layer w0.3: JP53.3 91.67,57.44 92.815,58.585 94.685,58.585 95.23,59.13 U1.24
SERVO-OUT15: JP54.3 U1.16 | length 17.2
  Top Layer w0.3: JP54.3 87.93,58.585 85.415,58.585 84.315,59.685 84.315,65.342 84.673,65.7 U1.16
SERVO-OUT16: JP55.3 U1.15 | length 15.4
  Top Layer w0.3: JP55.3 83.865,59.475 83.865,65.529 84.536,66.2 U1.15
SERVO-OUT17: JP56.3 U1.14 | length 15.3
  Top Layer w0.3: JP56.3 83.415,65.715 84.4,66.7 U1.14
SERVO-OUT18: JP57.3 U1.13 | length 17.3
  Top Layer w0.3: JP57.3 81.585,57.385 82.965,58.765 82.965,65.901 83.765,66.701 83.765,66.735 84.23,67.2 U1.13
SERVO-OUT19: JP58.3 U1.12 | length 20.5
  Top Layer w0.3: JP58.3 79.178,57.385 80.378,58.585 81.285,58.585 82.5,59.8 82.5,66.106 84.044,67.65 ; 84.094,67.7 U1.12
SERVO-OUT20: JP59.3 U1.11 | length 19.5
  Top Layer w0.3: JP59.3 81.625,59.925 82.05,60.35 82.05,66.293 83.957,68.2 U1.11
SERVO-OUT21: JP60.3 U1.10 | length 17
  Top Layer w0.3: JP60.3 77.34,63.943 78.54,65.143 78.54,66.137 78.539,66.139 78.539,66.802 80.436,68.7 U1.10
SERVO-OUT22: JP61.3 U1.9 | length 14.4
  Top Layer w0.3: JP61.3 77.34,66.24 80.3,69.2 U1.9
SERVO-OUT23: JP62.3 U1.5 | length 14.2
  Top Layer w0.3: JP62.3 77.34,68.64 78.97,70.27 83.87,70.27 84,70.4 84,70.473 84.727,71.2 U1.5@89.93,71.2
SERVO-OUT24: JP63.3 U1.4 | length 13
  Top Layer w0.3: JP63.3 83.611,70.72 84.591,71.7 U1.4
SERVO-VDD: C22.1 C23.2 C40.2 C41.2 C42.2 C43.2 C44.2 C45.2 C46.2 C47.2 C48.2 C49.2 C50.2 C51.2 C52.2 C53.2 C54.2 C55.2 C56.2 C57.2 C58.2 C59.2 C60.2 C61.2 C62.2 C63.2 JP20.2 JP21.2 JP40.2 JP41.2 JP42.2 JP43.2 JP44.2 JP45.2 JP46.2 JP47.2 JP48.2 JP49.2 JP50.2 JP51.2 JP52.2 JP53.2 JP54.2 JP55.2 JP56.2 JP57.2 JP58.2 JP59.2 JP60.2 JP61.2 JP62.2 JP63.2 R20.2 U21.3 | length 179.6
  Top Layer w0.8: 75.544,77.944 79.886,77.944 JP21.2 ; C22.1 75.848,78.848 77.072,80.072 ; R20.2 77.072,80.072 ; U21.3 83.82,80.82 83.07,80.07 77.074,80.07 77.072,80.072
  Top Layer w1.5: C22.1 75.544,77.944 74.8,77.2 JP20.2 JP63.2 JP62.2 JP61.2 JP60.2 JP59.2 JP58.2 74.8,55.6 75.6,54.8 85.955,54.8 94.21,54.8 102.465,54.8 110.72,54.8 116.5,54.8 117.07,55.37 JP45.2 JP44.2 JP43.2 JP42.2 JP41.2 JP40.2
  Bottom Layer w1.5: JP20.2 JP63.2 JP62.2 JP61.2 JP60.2 JP59.2 JP58.2 74.8,55.6 75.555,54.845 JP57.2 JP56.2 JP55.2 JP54.2 JP53.2 JP52.2 JP51.2 JP50.2 JP49.2 JP48.2 JP47.2 JP46.2 116.445,54.845 117.07,55.47 JP45.2 JP44.2 JP43.2 JP42.2 JP41.2 JP40.2
USB-DM: R81.2 U1.51 | length 2.2
  Top Layer w0.3: U1.51 R81.2
USB-DP: R80.2 U1.50 | length 3
  Top Layer w0.3: U1.50 98.73,76.53 99.25,77.05 R80.2
USB-VBUS: C80.2 JP80.1 L80.2 U1.52 | length 34.5
  Top Layer w0.3: v2(97.73,73.27) U1.52
  Top Layer w0.5: L80.2 99.54,82.06 v2(101,80.6) ; v2(101,77.1) 113.3,77.1 ; C80.2 113.1,76.9 113.3,77.1 ; JP80.1 113.54,77.34 113.3,77.1
  Bottom Layer w0.3: v2(97.73,73.27) 97.73,76.43 98.4,77.1 v2(101,77.1)
  Bottom Layer w0.5: v2(101,77.1) v2(101,80.6)
pads on no net: JP20.3 U1.3 U1.6 U1.7 U1.37 U1.38 U1.41 U1.42 U1.43 U1.47 U1.54 U1.55 U1.57 U1.59 U1.60 Y1.0

## Polygon pours and split planes (outlines as drawn)
GND on Bottom Layer "GND Bottom" (solid, remove dead copper, pour order 1006): 71,101 71,50.9 121,50.9 121,84.9 110,84.9 110,101
5V on Bottom Layer "5V Thermal" (solid, remove dead copper, pour order 1001): 78.4,90 85.8,90 85.8,79.5 78.4,79.5 78.4,90
3V3 on Bottom Layer "3V3 Thermal" (solid, remove dead copper, pour order 1002): 85.8,89.8 85.8,80.53 86.122,79.5 91.278,79.5 91.6,80.53 91.6,88.77 91.278,89.8 90.311,89.8 86.122,89.8 85.8,88.77
GND on Top Layer "GND Top" (solid, remove dead copper, pour order 1005): 71,101 110.1,101 110.1,84.9 121,84.9 121,51 71,51
5V on Top Layer "5V Thermal" (solid, remove dead copper, pour order 1003): 78.4,90 85.9,90 85.9,79.6 78.4,79.6 78.4,90
3V3 on Top Layer "3V3 Thermal" (solid, remove dead copper, pour order 1000): 85.8,89.8 85.8,80.53 86.122,79.5 91.278,79.5 91.6,80.53 91.6,88.77 91.278,89.8 90.311,89.8 86.122,89.8 85.8,88.77

## Silkscreen, mask and mechanical layers (free items; w line width, h text height)
Top Overlay:
  lines w0.12: 121,85 121,85 ; 121,85 121,51 71,51 71,101 110,101 110,85 121,85
  text "rev A" at 106,89.75 h0.6
  text "Serve.my-pi.org" at 91.8,88.4 h1.2
  text "24 ch servo board" at 91.8,86.9 h0.9
  text "for Raspberry Pi" at 91.8,85.5 h0.9
  text "BAT" at 79.1,76.9 h0.8 r270
  text "Reset" at 103.75,76.5 h1
  text "-" at 71.87,73.52 h0.8
  text "+" at 74.47,73.52 h0.8
  text "+" at 117.4,73 h0.8 r180
  text "-" at 120,73 h0.8 r180
  text "s" at 114.8,72.9 h0.8 r180
  text "24" at 78.8,71.355 h0.8 r270
  text "1" at 113,70.72 h0.8 r90
  text "23" at 78.8,68.815 h0.8 r270
  text "2" at 113,68.18 h0.8 r90
  text "22" at 78.8,66.275 h0.8 r270
  text "3" at 113,65.64 h0.8 r90
  text "21" at 78.8,63.1 h0.8 r270
  text "4" at 113,62.465 h0.8 r90
  text "20" at 78.8,60.56 h0.8 r270
  text "5" at 113,59.925 h0.8 r90
  text "18" at 81.51,59.525 h0.8 r180
  text "17" at 83.923,59.525 h0.8 r180
  text "16" at 86.445,59.525 h0.8 r180
  text "15" at 89.645,59.525 h0.8 r180
  text "14" at 92.245,59.525 h0.8 r180
  text "13" at 94.845,59.525 h0.8 r180
  text "12" at 98.02,59.525 h0.8 r180
  text "11" at 100.306,59.525 h0.8 r180
  text "10" at 103.1,59.525 h0.8 r180
  text "9" at 105.894,59.525 h0.8 r180
  text "8" at 108.434,59.525 h0.8 r180
  text "7" at 110.974,59.525 h0.8 r180
  text "19" at 78.8,58.02 h0.8 r270
  text "6" at 113,57.385 h0.8 r90
  text "s" at 77.07,55.205 h0.8
  text "s" at 114.26,55.205 h0.8
  text "-" at 71.87,55.105 h0.8
  text "+" at 74.47,55.105 h0.8
  text "+" at 116.74,55.105 h0.8
  text "-" at 119.22,55.105 h0.8
  text "+" at 113,54.515 h0.8 r90
  text "-" at 113,51.915 h0.8 r90
Bottom Overlay:
  text "rev A" at 94.25,89.75 h0.6
  text "Serve.my-pi.org" at 108.4,88.4 h1.2
  text "24 ch servo board" at 108.38,87 h0.9
  text "for Raspberry Pi" at 108.38,85.6 h0.9
  text "D57322" at 77.6,77.7 h1
Mechanical 13:
  lines w0.2: 71,51 71,101 110,101 110,100 110,96 110,85 121,85 121,51 71,51
  text "TOP Assembly layout" at 78.75,103.25 h1.5
Mechanical 15:
  lines w0.2: 71,51 71,101 110,101 110,98 110,96 110,85 121,85 121,51 71,51
  text "BOTTOM Assembly layout" at 105.75,103.25 h1.5

## Text inside footprints (layer, text, board x,y; h text height)
*1: Top Overlay "o" at 103.97,80.24 h1.7; Top Overlay "p" at 104.47,80.24 h1.7; Top Overlay "e" at 104.96,80.24 h1.7; Top Overlay "n" at 105.47,80.24 h1.7; Top Overlay "h" at 106.27,80.24 h1.7; Top Overlay "w" at 108.27,80.24 h1.7; Top Overlay "e" at 109.87,80.24 h1.7; Top Overlay "r" at 109.37,80.24 h1.7; Top Overlay "a" at 108.87,80.24 h1.7; Top Overlay "d" at 107.77,80.24 h1.7; Top Overlay "a" at 106.77,80.24 h1.7; Top Overlay "r" at 107.27,80.24 h1.7
*2: Bottom Overlay "o" at 110.03,80.24 h1.7; Bottom Overlay "p" at 109.53,80.24 h1.7; Bottom Overlay "e" at 109.04,80.24 h1.7; Bottom Overlay "n" at 108.53,80.24 h1.7; Bottom Overlay "h" at 107.73,80.24 h1.7; Bottom Overlay "w" at 105.73,80.24 h1.7; Bottom Overlay "e" at 104.13,80.24 h1.7; Bottom Overlay "r" at 104.63,80.24 h1.7; Bottom Overlay "a" at 105.13,80.24 h1.7; Bottom Overlay "d" at 106.23,80.24 h1.7; Bottom Overlay "a" at 107.23,80.24 h1.7; Bottom Overlay "r" at 106.73,80.24 h1.7
C12: Mechanical 13 "+" at 95.772,60.024 h1 r180
C20: Mechanical 13 "+" at 78.77,88.37 h1
C21: Mechanical 13 "+" at 91.91,89.35 h1 r180
C22: Mechanical 13 "+" at 77.844,79.348 h1 r180